# EAGLE board plusz-end-cap (EAGLE 9.6.2)
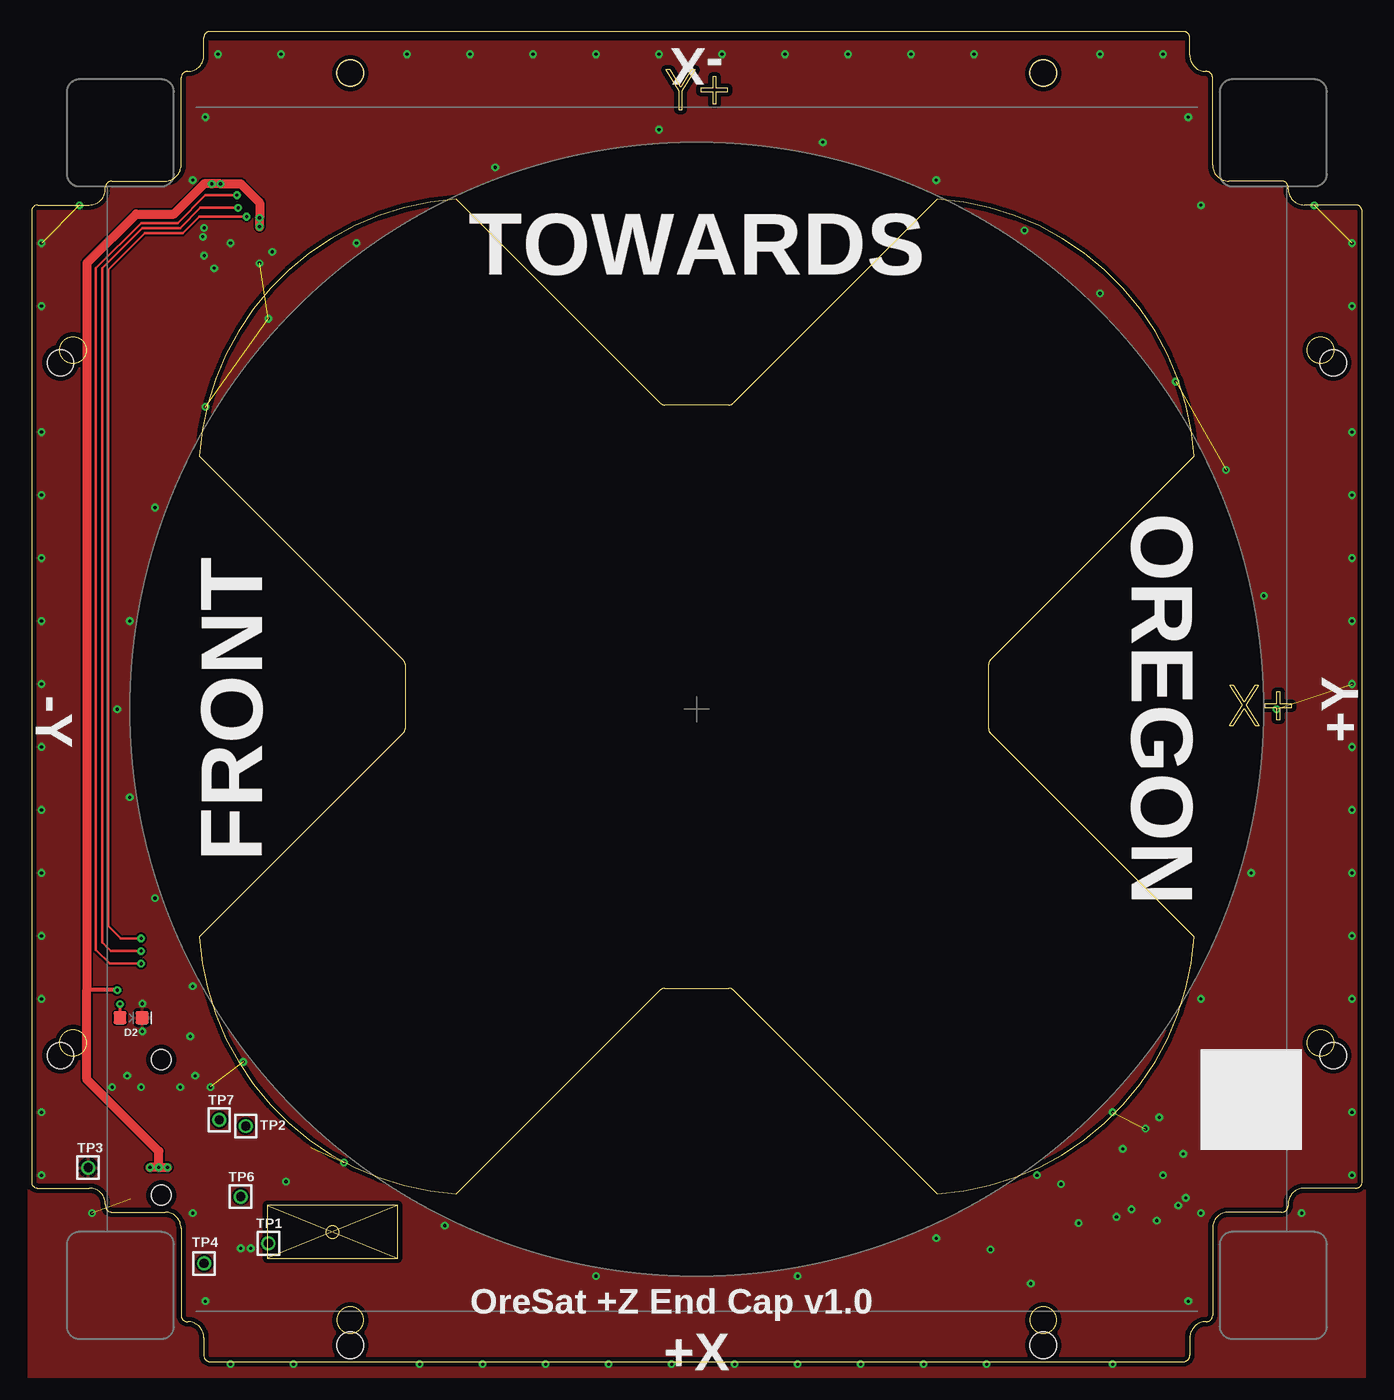
[diagram p0: board, top side]
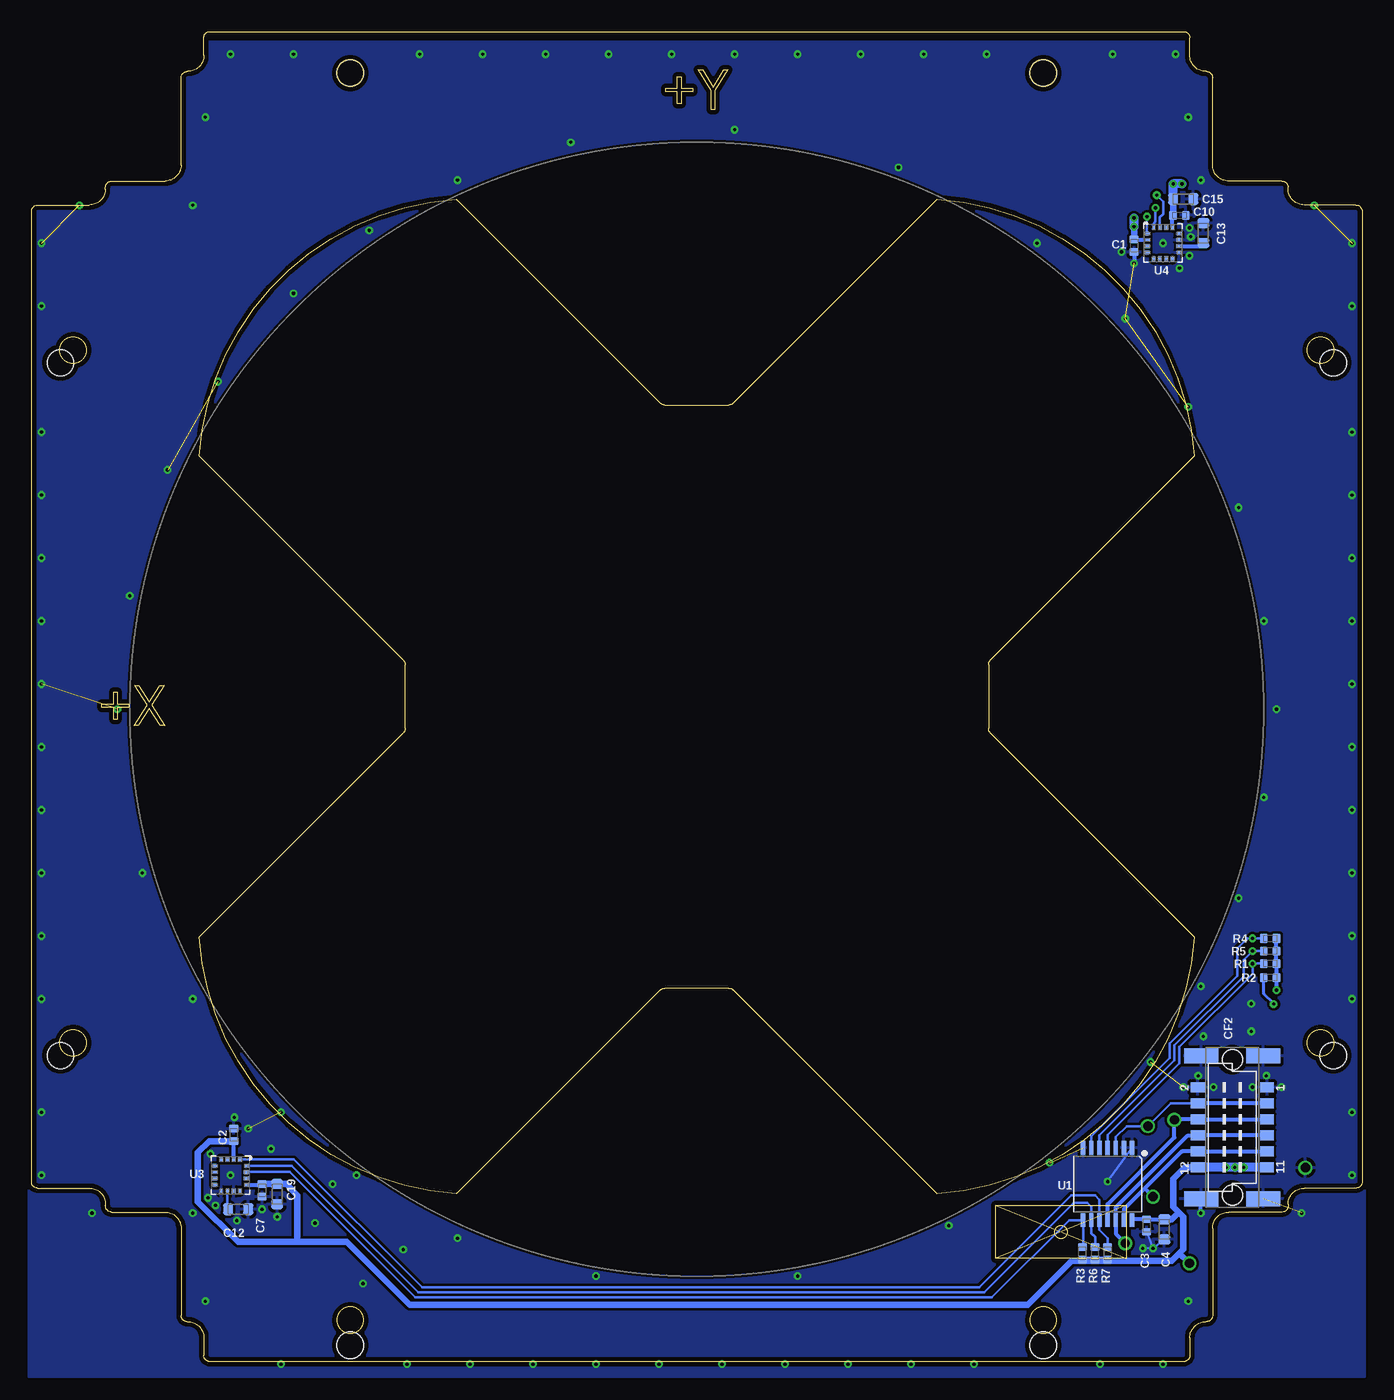
[diagram p1: board, bottom side, seen from below]

Size 105.6 x 105.6 mm. Coordinates in mm from the lower left corner, seen from the top.
Outline: 18.71,12.4 29.09,8.2
Outline: 29.09,12.4 18.71,8.2
Outline: 18.71,12.4 18.71,8.2
Outline: 29.09,12.4 18.71,12.4
Outline: 29.09,8.2 29.09,12.4
Outline: 18.71,8.2 29.09,8.2
Outline: 54.34,101.09 54.34,102.03 54.05,102.03 54.05,101.09 53.12,101.09 53.12,100.81 54.05,100.81 54.05,99.87 54.34,99.87 54.34,100.81 55.27,100.81 55.27,101.09 54.34,101.09
Outline: 52.67,102.56 52.34,102.56 51.51,101.19 50.67,102.56 50.35,102.56 51.37,100.89 51.37,99.38 51.65,99.38 51.65,100.89 52.67,102.56
Outline: 99.09,52.21 99.09,53.15 98.8,53.15 98.8,52.21 97.87,52.21 97.87,51.92 98.8,51.92 98.8,50.99 99.09,50.99 99.09,51.92 100.02,51.92 100.02,52.21 99.09,52.21
Outline: 97.4,53.67 97.07,53.67 96.24,52.38 95.41,53.67 95.08,53.67 96.07,52.12 95.04,50.5 95.37,50.5 96.24,51.86 97.11,50.5 97.44,50.5 96.4,52.12 97.4,53.67
Outline: 0.5,91.83 4.6,91.83 arc90 5.87,93.1 5.87,93.23 arc-90 6.37,93.73 10.6,93.73 arc90 11.87,95 11.87,101.93 arc-90 12.37,102.43 12.4,102.43 arc90 13.67,103.7 13.67,105.1 arc-90 14.17,105.6 91.43,105.6 arc-90 91.93,105.1 91.93,103.7 arc90 93.2,102.43 93.23,102.43 arc-90 93.73,101.93 93.73,95 arc90 95,93.73 99.23,93.73 arc-90 99.73,93.23 99.73,93.1 arc90 101,91.83 105.1,91.83 arc-90 105.6,91.33 105.6,14.27 arc-90 105.1,13.77 101,13.77 arc90 99.73,12.5 99.73,12.37 arc-90 99.23,11.87 95,11.87 arc90 93.73,10.6 93.73,3.67 arc-90 93.23,3.17 93.2,3.17 arc90 91.93,1.9 91.93,0.5 arc-90 91.43,0 14.17,0 arc-90 13.67,0.5 13.67,1.9 arc90 12.4,3.17 12.37,3.17 arc-90 11.87,3.67 11.87,10.6 arc90 10.6,11.87 6.37,11.87 arc-90 5.87,12.37 5.87,12.5 arc90 4.6,13.77 0.5,13.77 arc-90 0,14.27 0,91.33 arc-90 0.5,91.83
Outline: 71.88,92.28 55.7,76.1 arc-45 55.34,75.95 50.26,75.95 arc-45 49.9,76.1 33.72,92.28 arc83 13.32,71.88 29.5,55.7 arc-45 29.65,55.34 29.65,50.26 arc-45 29.5,49.9 13.32,33.72 arc83 33.72,13.32 49.9,29.5 arc-45 50.26,29.65 55.34,29.65 arc-45 55.7,29.5 71.88,13.32 arc83 92.28,33.72 76.1,49.9 arc-45 75.95,50.26 75.95,55.34 arc-45 76.1,55.7 92.28,71.88 arc83 71.88,92.28
Outline: circle at 23.9,10.3 radius 0.5
Outline: circle at 3.3,80.3 radius 1.05
Outline: circle at 25.3,102.3 radius 1.05
Outline: circle at 102.3,80.3 radius 1.05
Outline: circle at 80.3,102.3 radius 1.05
Outline: circle at 80.3,3.3 radius 1.05
Outline: circle at 102.3,25.3 radius 1.05
Outline: circle at 25.3,3.3 radius 1.05
Outline: circle at 3.3,25.3 radius 1.05
Copper layers (1*16): Top 0.0356mm / dielectric 1.5011mm / Bottom 0.0356mm
Design rules "OSH-Park-2-layer *": minimum track width 6mil, minimum drill 10mil, track to track 6mil, track to pad 6mil, pad to pad 6mil, via to via 6mil, smd to smd 6mil, copper to edge 15mil, drill to drill 6mil, minimum pad ring 7mil, minimum via ring 7mil, stop-mask expansion 3mil, vias tented up to drill 13mil, thermal gap 10mil
Holes 2.1 mm at 25.3,1.3 2.3,24.3 2.3,79.3 25.3,102.3 80.3,102.3 103.3,79.3 103.3,24.3 80.3,1.3
tRestrict: area 7.8,6.8 to 97.8,96.8
bRestrict: area 7.8,6.8 to 97.8,96.8

## Footprints (pad centres in the part's own frame; a part is rotated, then mirrored left to right if it is on the bottom)
.0402-B-NOSILK = smd 0.6 x 0.7: 1 -0.5,0; 2 0.5,0
.0603-B-NOSILK = smd 0.8 x 0.95: 1 -0.8,0; 2 0.8,0
HARWIN-M55-70X1242R = smd 0.8 x 1.1: 1 3.175,-2.75; 2 3.175,2.75; 3 1.905,-2.75; 4 1.905,2.75; 5 0.635,-2.75; 6 0.635,2.75; 7 -0.635,-2.75; 8 -0.635,2.75; 9 -1.905,-2.75; 10 -1.905,2.75; 11 -3.175,-2.75; 12 -3.175,2.75 | smd 1.2 x 2.7: P$1 -5.67,-2.45; P$2 -5.67,2.45; P$3 5.67,2.45; P$4 5.67,-2.45 | hole 1.6: -5.385,0; 5.385,0
LED-0603 = smd 1 x 1: A -0.877,0; C 0.877,0
2MM-TEST-POINT = drill 0.737: 1 0,0
TSSOP14-0.65-5.4X4.4MM = smd 0.35 x 1.1: 1 -1.95,-2.86; 2 -1.3,-2.86; 3 -0.65,-2.86; 4 0,-2.86; 5 0.65,-2.86; 6 1.3,-2.86; 7 1.95,-2.86; 8 1.95,2.86; 9 1.3,2.86; 10 0.65,2.86; 11 0,2.86; 12 -0.65,2.86; 13 -1.3,2.86; 14 -1.95,2.86
QLGA-16(3X3) = smd 0.45 x 0.3: 1 -1.275,0.75; 2 -1.275,0.25; 3 -1.275,-0.25; 4 -1.275,-0.75; 9 1.275,-0.75; 10 1.275,-0.25; 11 1.275,0.25; 12 1.275,0.75 | smd 0.3 x 0.45: 5 -0.75,-1.275; 6 -0.25,-1.275; 7 0.25,-1.275; 8 0.75,-1.275; 13 0.75,1.275; 14 0.25,1.275; 15 -0.25,1.275; 16 -0.75,1.275

## Placement (x,y rotation side)
C1  100n  [.0402-B-NOSILK]  18.1,88.6 270 bottom
C2  100n  [.0402-B-NOSILK]  89.55,18 90 bottom
C3  100n  [.0402-B-NOSILK]  17.1,10.8 270 bottom
C4  10u  [.0603-B-NOSILK]  15.7,10.5 270 bottom
C7  100n  [.0402-B-NOSILK]  87.3,13.6 270 bottom
C10  100n  [.0402-B-NOSILK]  14.5,91 0 bottom
C12  10u  [.0603-B-NOSILK]  89.2,12.1 0 bottom
C13  10u  [.0603-B-NOSILK]  12.6,89.6 90 bottom
C15  4.7u  [.0603-B-NOSILK]  14.2,92.3 0 bottom
C19  4.7u  [.0603-B-NOSILK]  86.1,13.3 270 bottom
CF2  J-HARWIN-M55-70X1242R  [HARWIN-M55-70X1242R]  10.3,18.6 90 bottom
D2  GREEN  [LED-0603]  7.9,27.3 0 top
R1  4.7k  [.0402-B-NOSILK]  7.3,31.6 0 bottom
R2  2.7k  [.0402-B-NOSILK]  7.3,30.5 0 bottom
R3  4.7k  [.0402-B-NOSILK]  22.2,8.6 270 bottom
R4  4.7k  [.0402-B-NOSILK]  7.3,33.6 0 bottom
R5  4.7k  [.0402-B-NOSILK]  7.3,32.6 0 bottom
R6  4.7k  [.0402-B-NOSILK]  21.2,8.6 270 bottom
R7  4.7k  [.0402-B-NOSILK]  20.2,8.6 270 bottom
TP1  TEST-POINT  [2MM-TEST-POINT]  18.8,9.4 0 top
TP2  TEST-POINT  [2MM-TEST-POINT]  17,18.7 0 top
TP3  TEST-POINT  [2MM-TEST-POINT]  4.5,15.4 0 top
TP4  TEST-POINT  [2MM-TEST-POINT]  13.7,7.8 0 top
TP6  TEST-POINT  [2MM-TEST-POINT]  16.6,13.1 0 top
TP7  TEST-POINT  [2MM-TEST-POINT]  14.9,19.2 0 top
U1  TCA9543A-PW  [TSSOP14-0.65-5.4X4.4MM]  20.2,14.1 180 bottom
U3  HMC5883L  [QLGA-16(3X3)]  89.8,14.8 270 bottom
U4  HMC5883L  [QLGA-16(3X3)]  15.8,88.8 0 bottom

## Library data of the parts
C1-C3 C7 C10 = rcl_custom; DIS: Digi-Key; DPN: 1276-1001-1-ND; MFR: Samsung; MPN: CL05B104KO5NNNC
C4 C12 C13 C15 C19 = oresat-rcl; DIS: Digi-Key; DPN: 1276-1001-1-ND; MFR: Samsung; MPN: CL05B104KO5NNNC
CF2 = J-Harwin-M55-70X1242R-12pin-1.27mm-M-vertical
D2 = SparkFun-LED; PROD_ID: DIO-00821
R1-R7 = rcl_custom; DIS: Digi-Key; DPN: 1276-4275-1-ND; MFR: Samsung; MPN: RC1005F6653CS
TP1-TP4 TP6 TP7 = Tova
U1 = U-TI-TCA9543A-I2C-2-to-1-multiplexer
U3 U4 = monitor-v2

## Nets
3.3V: C1.1 C2.1 C3.1 C4.1 C7.1 C10.1 C15.1 C19.1 CF2.11 CF2.12 R1.2 R2.2 R3.2 R4.2 R5.2 R6.2 R7.2 TP4.1 U1.14 U3.2 U3.13 U4.2 U4.13
!I2C-RESET: CF2.3 CF2.4 TP2.1 U1.3
!INT0: R1.1 U1.4 U4.15
!INT1: R3.1 U1.8 U3.15
GND: C1.2 C2.2 C3.2 C4.2 C7.2 C10.2 C12.2 C13.2 C15.2 C19.2 CF2.1 CF2.2 CF2.P$1 CF2.P$2 CF2.P$3 CF2.P$4 D2.C TP3.1 U1.1 U1.2 U1.7 U3.9 U3.11 U4.9 U4.11
I2C-!INT: CF2.5 CF2.6 TP7.1 U1.11
I2C-SCL: CF2.7 CF2.8 TP1.1 U1.12
I2C-SDA: CF2.9 CF2.10 TP6.1 U1.13
N$2: C12.1 U3.10
N$5: C13.1 U4.10
N$271: D2.A R2.1
SC1: R7.1 U1.10 U3.1
SCL0: R4.1 U1.6 U4.1
SD1: R6.1 U1.9 U3.16
SDA0: R5.1 U1.5 U4.16

## Tracks (layer width: path | path; a pad name or v marks a point on that pad's centre or on a via)
3.3V  (via drill 0.25)
  Top 0.3: v6.8,29.5 4.4,29.5
  Top 0.7: v10.1,15.43 10.1,16.7 4.4,22.4 4.4,29.5 4.4,87.2 8.3,91.1 11.3,91.1 13.7,93.5 v14.3,93.5 v15,93.5 16.6,93.5 18.1,92 v18.1,90.8 v18.1,90.1 | v10.1,15.43 v10.8,15.43 | v10.1,15.43 v9.4,15.43
  Bottom 0.3: U3.13 87.35,14.05 C7.1 | U3.2 C2.1 | U1.14 18.19,11.3 C3.1 C4.1 | R4.2 R5.2 R1.2 R2.2 v6.8,29.5 | U4.13 15.05,90.95 C10.1 | U4.2 18.05,89.05 C1.1
  Bottom 0.5: C7.1 C19.1 85.4,14.1 84.5,13.2 84.5,9.5 | C2.1 91.5,17.5 92.4,16.6 92.4,12.7 89.2,9.5 84.5,9.5 | 84.5,9.5 80.6,9.5 75.6,4.5 26.55,4.5 23.05,8 22.3,8 | CF2.12 14.08,15.43 15,14.5 15,12.3 14.55,11.85 | 14.5,8.6 14.2,8.9 14.2,11.5 14.55,11.85 | 14.5,8.6 15.1,8 22.3,8 | C4.1 15.1,11.3 14.55,11.85 | 22.3,8 R3.2 R6.2 R7.2 | C10.1 C15.1 | 14.5,8.6 TP4.1 | C1.1 v18.1,90.1
  Bottom 0.7: CF2.11 v10.1,15.43 CF2.12 | C15.1 v15,93.5 v14.3,93.5 | v18.1,90.1 v18.1,90.8
!I2C-RESET
  Bottom 0.2: CF2.4 15.2,20.5 TP2.1 18.7,18.7 19.55,17.85 U1.3
  Bottom 0.3: CF2.3 CF2.4
!INT0  (via drill 0.25)
  Top 0.2: v8.7,31.6 6.2,31.6 5.1,32.7 5.1,86.8 8.7,90.4 11.6,90.4 13.8,92.6 v16.3,92.6
  Bottom 0.2: U1.4 20.2,18 14.5,23.7 14.5,25 8.7,30.8 v8.7,31.6 R1.1 | U4.15 16.05,90.35 16.05,90.85 15.8,91.1 15.8,92.1 v16.3,92.6
!INT1
  Bottom 0.2: U3.15 85.09,15.05 75.14,5.1 29.4,5.1 23.26,11.24 U1.8 22.15,9.15
  Bottom 0.3: 22.15,9.15 R3.1
GND  (via drill 0.25)  (10 unrouted)
  Bottom 0.152: v20.2,14.3 U1.1 | C3.2 v16.6,9 | v16.6,9 v17.4,9 | v16.6,9 C4.2
  Bottom 0.3: C1.2 v18.1,87.2 | v12.8,11.8 CF2.P$2
  other vias: 12.6,25.82 89.8,14.8 91.6,13 89.3,11.2 87.3,12.1 91.4,16.5 86.1,11.5 83.1,11 88.4,18.5 86.6,16.9 81.7,14.1 76.1,8.9 79.3,6.2 8.8,28.42 8.8,26.22 0.8,14.8 0.8,19.8 0.8,28.8 0.8,33.8 0.8,38.8 0.8,43.8 0.8,48.8 0.8,53.8 0.8,58.8 0.8,63.8 0.8,68.8 0.8,73.8 0.8,88.8 0.8,83.8 104.8,14.8 104.8,19.8 104.8,28.8 104.8,33.8 104.8,38.8 104.8,43.8 104.8,48.8 104.8,53.8 104.8,58.8 104.8,63.8 104.8,68.8 104.8,73.8 104.8,88.8 104.8,83.8 14.8,103.8 19.8,103.8 29.8,103.8 34.8,103.8 39.8,103.8 44.8,103.8 49.8,103.8 54.8,103.8 59.8,103.8 64.8,103.8 69.8,103.8 74.8,103.8 84.8,103.8 89.8,103.8 15.8,-0.2 20.8,-0.2 30.8,-0.2 35.8,-0.2 40.8,-0.2 45.8,-0.2 50.8,-0.2 55.8,-0.2 60.8,-0.2 65.8,-0.2 70.8,-0.2 75.8,-0.2 85.8,-0.2 9.8,36.8 9.8,67.8 13.8,75.8 18.8,82.8 25.8,88.8 36.8,94.8 49.8,97.8 62.8,96.8 71.8,93.8 78.8,89.8 84.8,84.8 90.8,77.8 94.8,70.8 97.8,60.8 98.8,51.8 96.8,38.8 92.8,28.8 85.8,19.8 79.8,14.8 71.8,9.8 60.8,6.8 32.8,10.8 24.8,15.8 12.8,29.8 15.8,88.8 19.1,88.1 13.6,89.3 13.7,87.8 14.5,86.8 89.5,19.4 91,12.4 3.8,91.8 13.8,98.8 91.8,98.8 92.8,91.8 101.8,91.8 100.8,11.8 91.8,4.8 92.8,11.8 13.8,4.8 4.8,11.8 14.2,21.8 13,22.7 11.8,21.8 8.7,21.8 7.6,22.7 6.4,21.8 7.8,58.8 16.8,23.8 44.8,6.8 7.8,44.8 6.8,51.8 13.7,90 12.8,93.8
  pour Top (isolate 0.2, rank 6): -0.2,-1.2 105.8,-1.2 105.8,104.8 -0.2,104.8
  pour Bottom (isolate 0.2, rank 6): -0.2,-1.2 105.8,-1.2 105.8,104.8 -0.2,104.8
  pour Top: 90.8,1.8 92.8,3.8 92.8,11.8 93.8,12.8 98.8,12.8 100.8,14.8 104.8,14.8 104.8,89.8 103.8,90.8 99.8,90.8 97.8,92.8 93.8,92.8 92.8,93.8 92.8,101.8 90.8,103.8 15.8,103.8 13.8,101.8 13.8,95.8 10.8,92.8 9.8,92.8 7.8,92.8 6.8,91.8 5.8,90.8 0.8,90.8 0.8,15.8 1.8,14.8 5.8,14.8 6.8,13.8 6.8,12.8 8.8,12.8 9.8,11.8 12.8,11.8 12.8,3.8 13.8,2.8 14.8,1.8 15.8,0.8 23.8,0.8 23.8,4.8 25.8,4.8 26.8,3.8 78.8,3.8 80.8,5.8 84.8,1.8
I2C-!INT
  Bottom 0.3: CF2.5 CF2.6 14.87,19.23 TP7.1 14.9,17.8 20.2,12.5 U1.11
I2C-SCL
  Bottom 0.3: CF2.7 CF2.8 13.84,17.96 19.55,12.25 U1.12 19.55,10.15 TP1.1
I2C-SDA
  Bottom 0.3: CF2.9 CF2.10 14.31,16.7 17.25,13.75 | U1.13 18.9,12.1 17.25,13.75 | TP6.1 17.25,13.75
N$2
  Bottom 0.2: U3.10 90.05,12.15 C12.1
N$5
  Bottom 0.3: U4.10 12.85,88.55 C13.1
N$271  (via drill 0.25)
  Top 0.25: v7.02,28.39 D2.A
  Bottom 0.25: v7.02,28.39 7.02,28.42 7.8,29.2 R2.1
SC1
  Bottom 0.2: U3.1 84.77,16.07 74.6,5.9 30.4,5.9 23.1,13.2 21.2,13.2 20.85,12.85 U1.10 20.85,10.45 20.2,9.8 R7.1
SCL0  (via drill 0.25)
  Top 0.2: v8.7,33.6 7.1,33.6 6.1,34.6 6.1,86.7 9,89.6 12,89.6 13.3,90.9 v17.07,90.9
  Bottom 0.2: U1.6 21.5,17.9 15.28,24.12 15.28,25.26 9.9,30.64 9.9,32.8 9.1,33.6 v8.7,33.6 R4.1 | U4.1 v17.07,90.9
SD1
  Bottom 0.2: U3.16 84.95,15.55 74.9,5.5 30,5.5 22.9,12.6 21.8,12.6 21.5,12.3 U1.9 21.5,10.2 21.2,9.9 R6.1
SDA0  (via drill 0.25)
  Top 0.2: v8.7,32.6 6.3,32.6 5.6,33.3 5.6,86.8 8.8,90 11.8,90 13.4,91.6 v16.4,91.6
  Bottom 0.2: U1.5 20.85,17.95 14.9,23.9 14.9,25.1 9.4,30.6 9.4,31.9 v8.7,32.6 R5.1 | U4.16 16.55,90.35 16.4,90.5 v16.4,91.6

## Text on the board
tPlace: -X | TOWARDS | FRONT | OREGON | +Y | -Y | OreSat +Z End Cap v1.0 | +X